# Altium PCB PCB_Arduino_Nano.PcbDoc
Units mil, origin at the board's own origin, x right, y up, seen from the top; angles counter-clockwise.
Board outline 730 x 1700 mil, 2 copper layers (Top Layer, Bottom Layer); 31 components, 43 nets, 156 pads, 52 vias.
Unrouted connection lines stored in the file: 28.
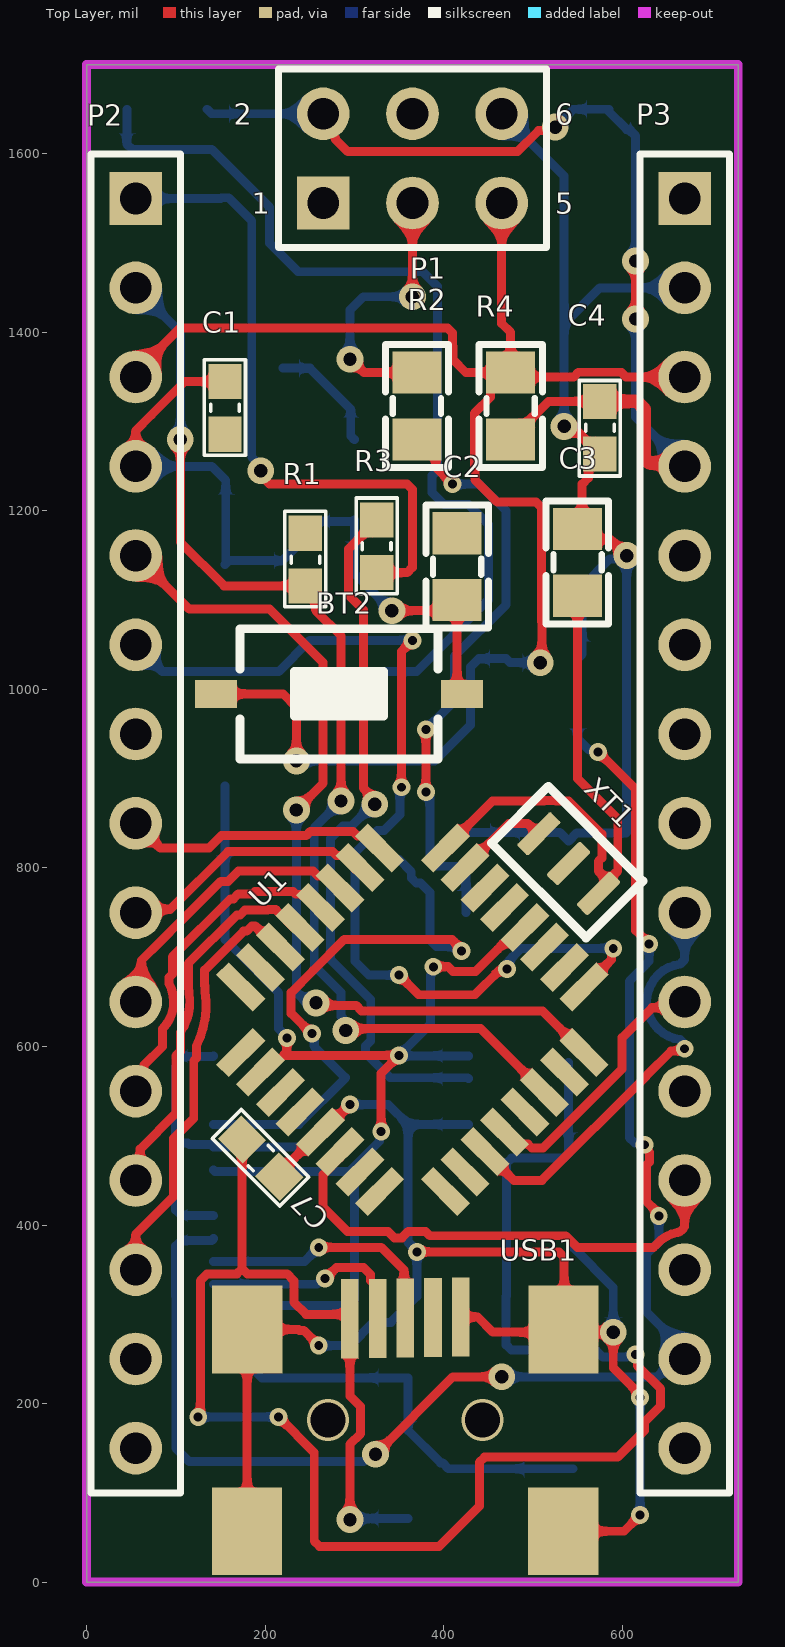
[diagram p0: Top Layer view]
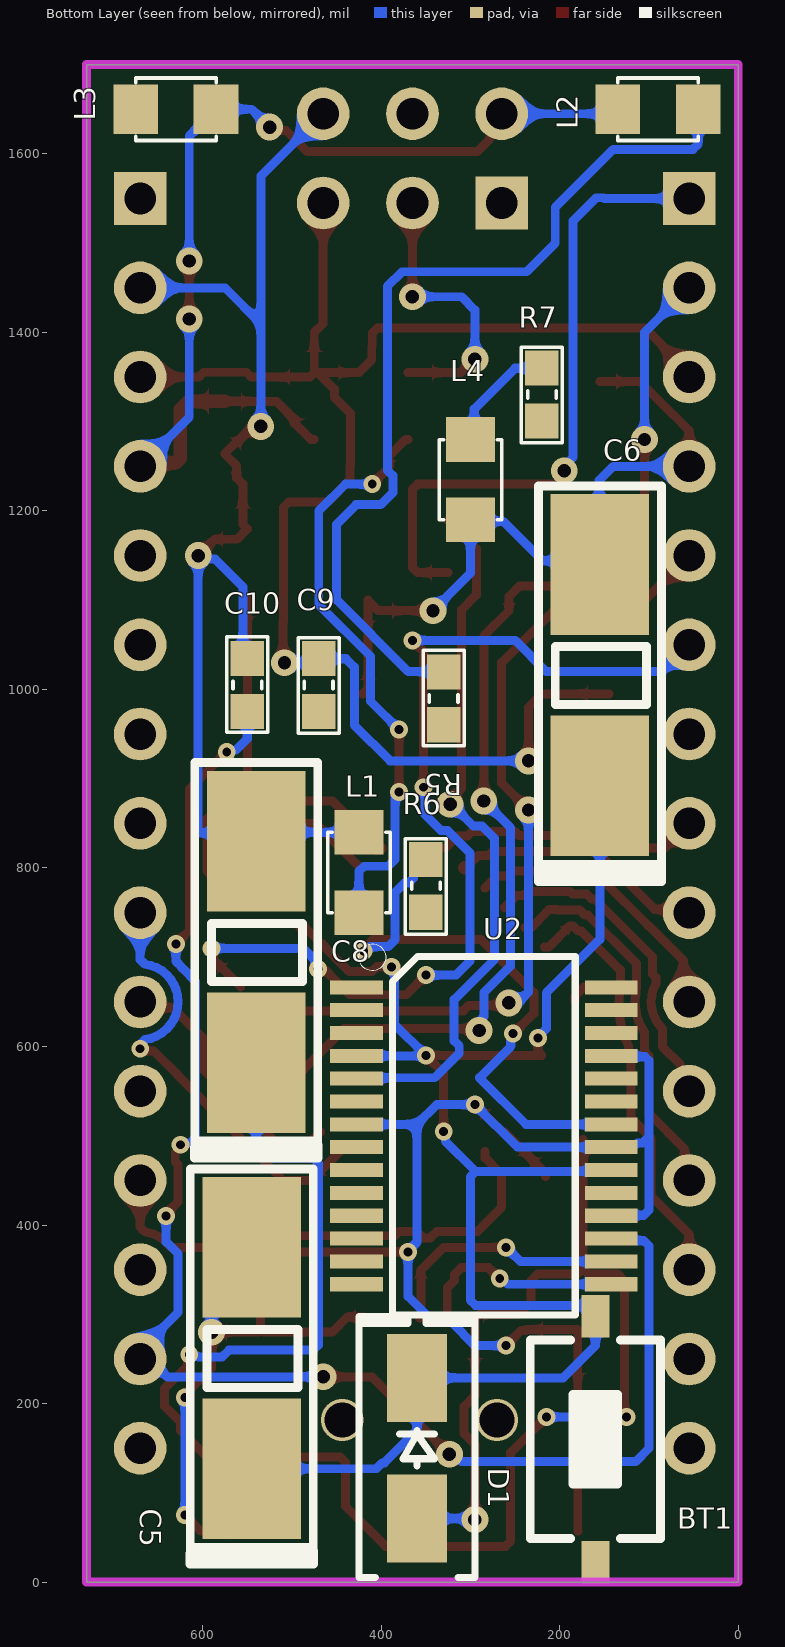
[diagram p1: Bottom Layer view, seen from below]

## Layer stack, top to bottom
Top Solder: solder mask 0.4, Solder Resist, Dk 3.5
Top Layer: signal copper 1.4
Dielectric 1: dielectric 12.6, FR-4, Dk 4.8
Bottom Layer: signal copper 1.4
Bottom Solder: solder mask 0.4, Solder Resist, Dk 3.5

## Board outline
0,0 0,1700 730,1700 730,0

## Design rules (kind name [scope] priority, off if disabled: settings)
Clearance [All] p1: gap=8 ignorepadtopadclearanceinfootprint=FALSE
PolygonConnect [All] p1: connectstyle=Relief reliefconductorwidth=10 reliefentries=4 polygonreliefangle="90 Angle" airgapwidth=10
RoutingVias [All] p1: holewidth=28 width=50 viastyle="Through Hole" minholewidth=10 minwidth=20 maxholewidth=15 maxwidth=30
SolderMaskExpansion [All] p1: expansion=4 istentingtop=FALSE
Width [All] p1: maxlimit=30 minlimit=10 preferedwidth=15
30 further rules are at their usual default settings.

## Components (designator, comment, footprint, x,y, rotation, side; value= is the part's Value field where it differs from the comment)
BT1 "Nut Nhan 2 Chan SMD 3x6x2.5" "Nut Nhan 2 Chan SMD 3x6x2.5" 160,160 r90 bottom
BT2 "Nut Nhan 2 Chan SMD 3x6x2.5" "Nut Nhan 2 Chan SMD 3x6x2.5" 282.8,995 r180 top
C1 "104" "tu 0603" 155,1315.47 r90 top
C2 "15pF" "tu 0805" 415.13,1137.77 r270 top
C3 "15pF" "tu 0805" 549.87,1142.23 r90 top
C4 "104" "tu 0603" 575,1293.17 r270 top
C5 "4.7uF" "tu tantalum smd6032" 545,250.98 r90 bottom
C6 "4.7uF" "tu tantalum smd6032" 155,1015.98 r90 bottom
C7 "104" "tu 0603" 195,475 r135 top
C8 "4.7uF" "tu tantalum smd6032" 540,705.98 r90 bottom
C9 "104" "tu 0603" 470,1005 r270 bottom
C10 "104" "tu 0603" 550,1005 r90 bottom
D1 "SS34" "DIODE SMA" 360,150 r90 bottom
L1 "LED 0805" LED-0805-Red 425,750 r90 bottom
L2 "LED 0805" LED-0805-Red 135,1650 r180 bottom
L3 "LED 0805" LED-0805-Green 585,1650 r0 bottom
L4 "LED 0805" LED-0805-Blue 300,1280 r270 bottom
P1 "Header 3X2" HDR2X3 265,1545 r0 top
P2 "Header 15" HDR1X15 55,1550 r270 top
P3 "Header 15" HDR1X15 670,1550 r270 top
R1 "1k" "tro smd 0603" 245,1145.47 r90 top
R2 "680R" "Tro SMD 0805" 367.61,1317.43 r90 top
R3 "1k" "tro smd 0603" 325,1160.47 r90 top
R4 "1k" "tro smd 0805" 472.61,1317.43 r90 top
R5 "680R" "tro smd 0603" 330,990 r90 bottom
R6 "680R" "tro smd 0603" 350,780 r270 bottom
R7 "680R" "tro smd 0603" 220,1330.42 r270 bottom
U1 "ATMEGA168-20AU" QFP80P900X900X120-32N 365,630 r225 top
U2 "INTERFACE-FT232RL(SSOP28)" SSOP28-0.65-10.2X5.2MM 285,500 r270 bottom
USB1 "USB Mini 5p SMD" "USB Mini 5p SMD" 360,160 r180 top
XT1 "20Mhz" "Thach Anh 3 Chan SMD" 506.59,838.41 r315 top value=4Mhz

## Footprints (in the part's own frame and the unit in brackets; to place one, negate y for a bottom-side part, rotate by r counter-clockwise, add the part's x,y. Pads: shape width x height; smd on the part's side, far side on the other; paste and mask are expansions set on the pad)
"DIODE SMA" [mm] "SMA"
  rect 2.5x1.7 smd: 1(-2,0) 2(2,0)
  silkscreen extent -3.68,-1.65 3.75,1.65, body extent -2.6,-1.37 2.6,1.37, height 2.4
HDR1X15 [mm] "Connector; Header; 15 Position"
  rect 1.5x1.5 hole 0.9: 1(0,0)
  round 1.5 hole 0.9: 2(2.54,0) 3(5.08,0) 4(7.62,0) 5(10.16,0) 6(12.7,0) 7(15.24,0) 8(17.78,0) 9(20.32,0) 10(22.86,0) 11(25.4,0) 12(27.94,0) 13(30.48,0) 14(33.02,0) 15(35.56,0)
  silkscreen extent -1.27,-1.27 36.83,1.27
HDR2X3 [mm] "Connector; Header; 3x2 Position"
  rect 1.5x1.5 hole 0.9: 1(0,0)
  round 1.5 hole 0.9: 2(0,2.54) 3(2.54,0) 4(2.54,2.54) 5(5.08,0) 6(5.08,2.54)
  silkscreen extent -1.27,-1.27 6.35,3.81
LED-0805-Blue [mil]
  rect 50x55 smd: 1(0,0) 2(90,0)
  silkscreen extent 0,-35 90,35, body extent 5,-25 85,25, height 43
LED-0805-Green [mil]
  rect 50x55 smd: 1(0,0) 2(90,0)
  silkscreen extent 0,-35 90,35, body extent 5,-25 85,25, height 43
LED-0805-Red [mil]
  rect 50x55 smd: 1(0,0) 2(90,0)
  silkscreen extent 0,-35 90,35, body extent 5,-25 85,25, height 43
"Nut Nhan 2 Chan SMD 3x6x2.5" [mm] "Switch SMD type"
  rect 1.2x0.8 smd: 1(-3.5,0) 2(3.5,0)
  silkscreen extent -2.82,-1.85 2.82,1.85, body extent -3.05,-1.85 3.05,1.85, height 2.5
QFP80P900X900X120-32N [mil]
  rect 58x20 smd: 1(-162,110) 2(-162,79) 3(-162,47) 4(-162,16) 5(-162,-16) 6(-162,-47) 7(-162,-79) 8(-162,-110) 17(162,-110) 18(162,-79) 19(162,-47) 20(162,-16) 21(162,16) 22(162,47) 23(162,79) 24(162,110)
  rect 20x58 smd: 9(-110,-162) 10(-79,-162) 11(-47,-162) 12(-16,-162) 13(16,-162) 14(47,-162) 15(79,-162) 16(110,-162) 25(110,162) 26(79,162) 27(47,162) 28(16,162) 29(-16,162) 30(-47,162) 31(-79,162) 32(-110,162)
SSOP28-0.65-10.2X5.2MM [mm]
  rect 0.4x1.5 smd: 1(-4.225,-3.625) 2(-3.575,-3.625) 3(-2.925,-3.625) 4(-2.275,-3.625) 5(-1.625,-3.625) 6(-0.975,-3.625) 7(-0.325,-3.625) 8(0.325,-3.625) 9(0.975,-3.625) 10(1.625,-3.625) 11(2.275,-3.625) 12(2.925,-3.625) 13(3.575,-3.625) 14(4.225,-3.625) 15(4.225,3.625) 16(3.575,3.625) 17(2.925,3.625) 18(2.275,3.625) 19(1.625,3.625) 20(0.975,3.625) 21(0.325,3.625) 22(-0.325,3.625) 23(-0.975,3.625) 24(-1.625,3.625) 25(-2.275,3.625) 26(-2.925,3.625) 27(-3.575,3.625) 28(-4.225,3.625)
  silkscreen extent -5.46,-3.56 5.1,2.6
"Thach Anh 3 Chan SMD" [mm] "SMD Crystal CMR309T package"
  rrect25% 0.45x1.35 smd: 1(0,0) 2(1.2,0) 3(2.4,0)
  silkscreen extent -0.76,-1.14 3.05,1.14, body extent -0.41,-0.63 2.79,0.67, height 1.02
"tro smd 0603" [mm] "Chip Capacitor, 2-Leads, Body 1,60x0,80mm, IPC Medium Density"
  rect 1x0.95 smd mask+0.076: 1(-0.75,0) 2(0.75,0)
  silkscreen extent -1.35,-0.58 1.37,0.58, body extent -0.82,-0.42 0.82,0.43, height 0.44
"Tro SMD 0805" [mm]
  rect 1.2x1.4 smd: 1(-0.946,-0.061) 2(0.954,-0.061)
  silkscreen extent -1.75,-0.97 1.75,0.84, body extent -1.56,-0.76 1.44,0.64, height 0.53
"tro smd 0805" [mm]
  rect 1.2x1.4 smd: 1(-0.946,-0.061) 2(0.954,-0.061)
  silkscreen extent -1.75,-0.97 1.75,0.84, body extent -1.56,-0.76 1.44,0.64, height 0.53
"tu 0603" [mm] "Chip Capacitor, 2-Leads, Body 1,60x0,80mm, IPC Medium Density"
  rect 1x0.95 smd mask+0.076: 1(-0.75,0) 2(0.75,0)
  silkscreen extent -1.35,-0.58 1.37,0.58, body extent -0.8,-0.4 0.8,0.4, height 0.9
"tu 0805" [mm] "Compoment SMD 80x50mil"
  rect 1.2x1.4 smd: 1(-0.946,-0.003) 2(0.954,-0.003)
  silkscreen extent -1.75,-0.89 1.75,0.89, body extent -1.01,-0.64 1.01,0.63, height 0.61
"tu tantalum smd6032" [mm]
  rect 4x2.8 smd: 1(-3.15,0) 2(3.15,0)
  silkscreen extent -5.87,-1.75 5.38,1.75, body extent -3.15,-1.75 3.15,1.75, height 2.79
"USB Mini 5p SMD" [mm]
  rect 0.5x2.25 smd: 1(1.651,-3.429) 2(0.864,-3.442) 3(0.076,-3.454) 4(-0.711,-3.467) 5(-1.499,-3.48)
  rect 2x2.5 smd: 5(-4.424,-3.124) 5(-4.42,2.616) 5(4.576,-3.124) 5(4.58,2.616)
  body extent -5.27,-3.8 5.43,5.4, height 3.95

## Part data
C1 C4 C7 C9 C10: library part "Tu 0603 104 50V 10%", "Dán", Chung_Loai=Dán, Don_Vi=Con, Ma_Hang=MH004568, So_Chan=2, Ten_Linh_Kien="Tụ 0603 104-100nF 10% 50V"
C2 C3: library part "Tu 0805 15pF 50V 10%", "Dán", Chung_Loai=Dán, Don_Vi=Con, Ma_Hang=MH004556, So_Chan=2, Ten_Linh_Kien="Tụ 0805 15P 10% 50V"
C5 C6 C8: library part "Tu tantalum 4.7uF 35V SMD6032", "Dán", Chung_Loai=Dán, Don_Vi=Con, Ma_Hang=MH008687, So_Chan=2, Ten_Linh_Kien="Tụ tantalum 475V-4.7uF 35V SMD6032"
D1: library part "Diode SS34 ( 1N5822 )", "Dán", Chung_Loai=Dán, Don_Vi=Con, Ma_Hang=MH002104, Ten_Linh_Kien="Diode SS34 3A 40V SMA ( 1N5822 SS34A)"
L1 L2: library part "LED 0805 Do", "Dán", Chung_Loai=Dán, Don_Vi=Con, Ma_Hang=MH000897, Ten_Linh_Kien="LED 0805 Màu Đỏ (Red)"
L3: library part "LED 0805 Xanh La", "Dán", Chung_Loai=Dán, Don_Vi=Con, Ma_Hang=MH002326, Ten_Linh_Kien="LED 0805 Màu Xanh Lá (Green)"
L4: library part "LED 0805 Xanh Duong", "Dán", Chung_Loai=Dán, Don_Vi=Con, Ma_Hang=MH002327, Ten_Linh_Kien="LED 0805 Màu Xanh Dương (Blue)"
P1: "Header, 3-Pin, Dual row", LatestRevisionDate=17-Jul-2002, LatestRevisionNote="Re-released for DXP Platform.", Publisher="Altium Limited"
P2 P3: "Header, 15-Pin", LatestRevisionDate=17-Jul-2002, LatestRevisionNote="Re-released for DXP Platform.", Publisher="Altium Limited"
R1 R3: library part "Tro 0603 5% 1k", "Dán", Chung_Loai=Dán, Don_Vi=Con, Ma_Hang=MH006319, So_Chan=2, Ten_Linh_Kien="Trở 0603 5% 1k"
R2: library part "Tro 0805 5% 680R", "Dán", Chung_Loai=Dán, Don_Vi=Con, Ma_Hang=MH005344, So_Chan=2, Ten_Linh_Kien="Trở 0805 5% 680R"
R4: library part "Tro 0805 5% 1k", "Dán", Chung_Loai=Dán, Don_Vi=Con, Ma_Hang=MH005234, So_Chan=2, Ten_Linh_Kien="Trở 0805 5% 1k"
R5 R6 R7: library part "Tro 0603 1% 680R", "Dán", Chung_Loai=Dán, Don_Vi=Con, Ma_Hang=MH006336, So_Chan=2, Ten_Linh_Kien="Trở 0603 1% 680R"
U1: "AVR AVRÂ® ATmega Microcontroller IC 8-Bit 20MHz 16KB _8K x 16_ FLASH 32-TQFP _7x7_", Package="TQFP-32 Microchip", Availability=Unavailable, MF=Microchip, MP=ATMEGA168-20AU, Price=None, SnapEDA_Link=https://www.snapeda.com/parts/ATMEGA168-20AU/Microchip/view-part/776709/?ref=snap
U2: "USB Bridge, USB to UART USB 2.0 UART Interface 28-SSOP", Package="SSOP-28 FTDI, Future", Availability=Unavailable, MF="FTDI, Future", MP=FT232RL, Price=None, SnapEDA_Link=https://www.snapeda.com/parts/FT232RL/FTDI%2C%20Future%20Technology%20Devices%20International%20Ltd/view-part/1077088/?ref=snap
USB1: "USB Type B", Ma_Hang=MH001022, Ten="MiniUSB 5P SMD"
XT1: library part "Thach anh 3 Chan SMD", "Crystal For all Crystal 2pin."
BT1 BT2: Ma_Hang=MH001036, Ten="Nút Nhấn 2 Chân 3x6x2.5MM SMD"

## Via types
v1: diameter 20, hole 10, Top Layer to Bottom Layer, 29 vias
v2: diameter 30, hole 15, Top Layer to Bottom Layer, 21 vias
v3: diameter 47.24, hole 39.37, Top Layer to Bottom Layer, 2 vias

## Nets (pads, with @x,y where several pads share a name; then routed paths per layer and width w, separated by ;. In a path a pad name is that pad's centre, name@x,y a point inside that pad or via, vN(x,y) a via of type N, cw(c..) or ccw(c..) an arc to the next point about the centre after c; other vN are vias at no path point)
3V3: C10.1 P3.14 U2.17 | length 1715.5
  Top Layer w10: v2(323.64,143.29) 410.35,230 v2(465,230) ; v1(573,930) 615,888 615,730 v1(630,715) ; v1(625,490) 625,487.29 630.71,481.58 630.71,470.86 627.47,467.62 627.47,426.23 641,412.71 v1(641,410)
  Bottom Layer w10: U2.17 140.09,382.65 105.86,382.65 99.76,376.55 99.76,320.4 100,320.16 100,150 115,135 309.94,135 318.23,143.29 v2(323.64,143.29) ; v2(465,230) 639.61,230 659.61,250 P3.14 670,260 627.47,302.53 627.47,367.62 641,381.14 v1(641,410) ; C10.1 550,945 563.09,931.91 571.09,931.91 v1(573,930) v1@575,930 ; v1(625,490) 623.09,491.91 614.05,491.91 608.12,497.84 608.12,673.12 622.45,687.45 cw(c670,650) 627.2,692.8 630,695.6 v1(630,715)
A0: P3.5 U1.23
A1: P3.6 U1.24
A2: P3.7 U1.25
A3: P3.8 U1.26
A4: P3.9 U1.27 | length 498.9
  Top Layer w10: U1.27 478.53,450 510,450 627.47,567.47 627.47,567.62 654.86,595 660.4,595 661.02,595.61 668.09,595.61 v1(670,597.53) ; P3.9@666.33,746.33 P3.9
  Bottom Layer w10: v1(670,597.53) 670,602.58 667.07,605.5 664.78,607.79 cw(c670,650) 664.78,692.21 667.07,694.5 670,697.42 P3.9
A5: P3.10 U1.28 | length 297.6
  Top Layer w10: U1.28 481.67,490.7 494.4,490.7 498.92,486.19 511.19,486.19 600,575 600,610 633.51,643.51 663.51,643.51 P3.10
A6: P3.11 U1.19
A7: P3.12 U1.22 | length 559.4
  Top Layer w10: U1.22 283.68,475.14 265,456.46 265,420 289.07,395.93 292,393 337.46,393 344.82,385.63 353.11,385.63 360.47,393 379.53,393 384.53,388 536.6,388 549.6,375 634.97,375 637.9,377.93 638.11,378.14 cw(c670,350) 661.95,391.76 ccw(c660,401.57) 668.16,395.79 670,398.39 P3.12
AREF: BT1.1 C1.1 P3.13 U1.20
D0/RX: P2.2 R1.1 U1.30 | length 1260.4
  Top Layer w10: v2(105,1280) 105,1165 154.06,1115.94 R1.1 256.83,1104.12 256.83,1088.17 285,1060 v2(285,875) ; v2(290.3,618) 292.3,620 441.47,620 U1.30
  Bottom Layer w10: P2.2 105,1400 v2(105,1280) ; v2(285,875) 255,845 255,690.42 285,660.42 285,633.86 286.47,632.39 286.47,621.83 v2(290.3,618)
D1/TX: P2.1 R3.1 U1.31 | length 736.5
  Top Layer w10: v2(195,1245) 195,1240 205,1230 359.14,1230 365,1224.14 365,1136.8 359.14,1130.94 R3.1
  Bottom Layer w10: P2.1 150,1550 150.86,1550.86 159.14,1550.86 185,1525 185,1260.41 195,1250.41 v2(195,1245)
D2: P2.5 U1.32 | length 991.6
  Top Layer w10: P2.5 115,1090 205,1090 265,1030 265,895 v2(235,865) ; v2(257,648.83) 259.83,646 301.9,646 307.9,640 510.56,640 U1.32
  Bottom Layer w10: v2(235,865) 235,660.97 243.32,652.65 253.17,652.65 v2(257,648.83)
D3: P2.6 U1.1 | length 1117.2
  Top Layer w10: v1(350,680) 372,658 435.04,658 461.99,684.95 469.06,684.95 v1(470.97,686.87) ; v1(352.54,890.49) 352.54,1042.54 v1(365,1055) ; U1.1 588.09,697.52 588.09,708.09 v1(590,710)
  Bottom Layer w10: P2.6 85,1020 215,1020 250,1055 v1(365,1055) ; v1(350,680) 316.34,680 300.67,695.67 300.67,816.97 325.91,842.21 333.19,842.21 350.83,859.86 350.83,888.78 v1(352.54,890.49) 353.03,890 v1@355,890 ; v1(470.97,686.87) 472.89,688.78 472.89,695.85 487.04,710 v1(590,710)
D4: P2.7 U1.2
D5: P2.8 U1.9 | length 300.1
  Top Layer w10: P2.8 82.67,822.33 136.88,822.33 150.91,836.36 245.96,836.36 250.59,840.99 298.26,840.99 303.48,835.77 314.8,835.77 U1.9
D6: P2.9 U1.10 | length 288.1
  Top Layer w10: P2.9 58.67,753.67 93.67,753.67 158.36,818.36 275.63,818.36 280.15,813.85 291.15,813.85 302.77,802.23 U1.10@302.77,800.41
  Top Layer w15: U1.10@302.77,800.41 U1.10
D7: P2.10 U1.11 | length 320.5
  Top Layer w10: P2.10 61.49,656.49 61.49,696.49 82.93,717.93 ccw(c55,750) 87.07,722.07 100.67,735.67 101.13,735.67 150.46,785 158.63,785 170.07,796.44 253.71,796.44 258.93,791.22 270.25,791.22 U1.11
D8: P2.11 U1.12 | length 372.3
  Top Layer w10: P2.11 64.39,559.39 64.39,579.39 85,600 85,615.95 85,619.86 ccw(c55,650) 92.2,670.61 92.2,673.05 92.2,677.2 96.09,681.09 96.09,700.5 160.86,765.27 164.36,765.27 170.09,771 186,771 188.81,773.81 231.08,773.81 234.29,770.61 239.94,770.61 241.26,769.3 248.33,769.3 U1.12
D9: P2.12 U1.13 | length 424.7
  Top Layer w10: P2.12 60,455 60,485 100,525 100,589.54 105,594.54 105,615.89 ccw(c55,650) 114.75,659.65 cw(c124.64,661.18) 114.67,660.37 114.13,666.97 ccw(c104.16,666.15) 114.09,667.36 114.09,693.05 168.31,747.27 171.81,747.27 177.54,753 196.24,753 196.78,752.72 198.58,752.72 202.72,752.72 203.63,753.63 207.53,753.63 211.67,753.63 214.6,750.7 232.06,733.24 U1.13
D10: P2.13 U1.14 | length 481.1
  Top Layer w10: P2.13 55,389.86 97.53,432.38 97.53,497.07 120,519.54 120,584.09 123,587.09 123,600.84 ccw(c31.08,646.61) 132.75,661 132.75,667.74 132.13,668.36 132.13,674.78 132.09,674.82 132.09,685.59 175.77,729.27 179.27,729.27 185,735 188.78,735 212.46,711.32 U1.14
D11/MOSI: P1.4 P2.14 U1.15
D12/MISO: P1.1 P2.15 U1.16 | length 41.6
  Top Layer w10: P2.15 P2.15@68.27,150 ; U1.16 182.67,656.77 U1.16@182.67,649.7
  Bottom Layer w10: P1.1 P1.1@270,1540
D13/SCK: P1.3 P3.15 R2.2 U1.17 | length 326.6
  Top Layer w10: v2(295,1370) 295.86,1370 310.86,1355 R2.2 ; v2(365,1440) P1.3 P1.3@371.49,1538.51
  Bottom Layer w10: v2(295,1370) 295,1425 310,1440 v2(365,1440)
GND: BT2.1 C1.2 C2.2 C3.2 C4.2 C5.2 C6.2 C7.1 C8.2 C10.2 L1.2 L4.2 P1.6 P2.4 P3.2 U1.3 U1.5 U1.21 U2.7 U2.18 U2.21 U2.25 USB1.5 | length 4455.3
  Top Layer w10: P2.4 55,1290 72.47,1307.47 72.62,1307.47 110.14,1345 C1.2 ; USB1.5@179.67,57 179.83,57.17 179.83,283 237.4,283 238.4,282 243,282 v1(260,265) ; C7.1 215.88,458.25 U1.21 ; U1.21@263.83,503.83 v1(295,535) ; v2(342,1088.26) 403.06,1088.26 C2.2 415,1000.59 BT2.1 ; v1(370,370) 529.14,370 535,364.14 535,283.83 USB1.5@534.17,283 ; USB1.5@419,297 438,297 455,280 531.17,280 USB1.5@534.17,283 ; USB1.5@534.17,57.17 534,57 602,57 v1(620,75) ; v2@535,1295 534.85,1294.85 v2(534.85,1294.69) 538.68,1290.87 547.77,1290.87 560.31,1278.32 561.3,1278.32 575,1264.62 C4.2 562.02,1250.66 562.02,1237.02 555,1230 555,1184.8 C3.2 561.5,1168.3 586.7,1168.3 v2(605,1150) ; v1(620,207) 618.09,208.91 618.09,211.91 590,240 v2(590,280) 537.17,280 USB1.5@534.17,283
  Bottom Layer w10: P2.4 140,1250 155.86,1234.14 C6.2@155.86,1140.86 ; U2.18 141.83,410.88 105.86,410.88 99.76,416.98 99.76,474.87 100,475.12 100,499.29 ; U2.25 141.41,588.69 104.55,588.69 100,584.14 100,577.48 99.76,577.24 99.76,550.72 99.76,499.54 100,499.29 ; C6.2 C6.2@155.86,1140.86 ; v1(260,265) 295.2,265 321.15,290.95 340.95,290.95 370,320 v1(370,370) 370,370.86 360,380.86 360,512.8 ; v2(342,1088.26) 300,1130.26 L4.2 298.36,1188.36 263.36,1188.36 219.26,1144.26 159.26,1144.26 C6.2@155.86,1140.86 ; L1.2 530,840 C8.2 549.26,839.26 604.26,839.26 605,840 v2(605,1150) 601.29,1146.29 586.29,1146.29 555,1115 555,1039.53 C10.2 ; U2.7 360,512.8 ; P1.6 534.85,1575.15 534.85,1409.85 ; v2(534.85,1294.69) 534.85,1409.85 ; C5.2 590,330 v2(590,280) ; v1(620,75) v1(620,207) ; P3.2 575,1450 534.85,1409.85 ; 100,499.29 107.37,491.92 113.08,491.92 114.92,490.08 139.41,490.08 U2.21 247.2,487.2 v1(295,535) 337.8,535 360,512.8
NetAMS1_2: R7.2
NetC9_2: C9.2 U2.2
NetL1_1: L1.1 R2.1 | length 653.3
  Top Layer w10: R2.1 372.48,1280.2 391.1,1261.57 391.1,1248.9 v1(410,1230) ; v1(380,885) v1(380,955)
  Bottom Layer w10: v1(380,955) 412,987 412,1037 470,1095 470,1200 440,1230 v1(410,1230) ; v1@384.5,877.79 384.5,809.62 392.12,802 419.14,802 425,796.14 L1.1
NetL2_2: L2.2 R5.2 | length 1025.9
  Bottom Layer w10: L2.2 45,1610.86 50.86,1605 140,1605 205,1540 205,1500 237,1468 376.6,1468 393,1451.6 393,1245.53 387,1239.53 387,1220.47 400.47,1207 428,1207 450,1185 450,1100.46 369.54,1020 330.47,1020 R5.2
NetL3_2: L3.2 R6.2
NetL4_1: L4.1 R7.1 | length 130.7
  Bottom Layer w10: R7.1 250.06,1359.94 295.86,1314.14 295.86,1284.14 L4.1
NetR5_1: R5.1 U2.23
NetR6_1: R6.1 U2.22 | length 650.1
  Top Layer w10: v1(252.45,614.57) 251.65,614.57 229,637.23 229,660.42 253.58,685 288.58,720 409.14,720 420,709.14 v1(420,707)
  Bottom Layer w10: U2.22 237.8,512.8 290.18,565.18 289.82,565.18 255,600 v1@255,604.95 ; R6.1 363.7,795.83 363.7,789.02 369.56,783.16 374.09,783.16 384.5,772.74 384.5,719.62 392.12,712 412.29,712 417.29,707 v1(420,707)
RESET: BT2.2 C9.1 P1.5 P2.3 P3.3 R4.2 U1.29 | length 1793.8
  Top Layer w10: P2.3 55,1355 105,1405 404.14,1405 410,1399.14 410,1384.57 410.56,1384.01 410.56,1369.44 425,1355 R4.2@471.06,1355 ; BT2.2 220,995 235,980 v2(235,920) ; P1.5 465,1410 475,1400 R4.2 ; v2(508.3,1030) 510,1031.7 510,1075.43 509.44,1075.99 509.44,1204.14 503.58,1210 460,1210 435,1235 435,1250.63 434.44,1251.19 434.44,1309.2 435,1309.76 435,1310 452.44,1327.44 452.44,1336.38 R4.2@471.06,1355 ; P3.3 604.46,1350 599.09,1355.38 550.91,1355.38 545.54,1350 480,1350 R4.2 ; R4.2@471.06,1355 R4.2
  Bottom Layer w10: v2(235,920) 390,920 430,960 430,1025 439.53,1034.53 C9.1 474.53,1030 v2(508.3,1030)
RX: R1.2 U2.1
TX: R3.2 U2.5 | length 798.3
  Top Layer w10: v2(322.83,871.46) 322.83,876.76 310,889.6 310,1089.17 293.3,1105.88 293.3,1157.31 325,1189.02 R3.2
  Bottom Layer w10: v2(322.83,871.46) 321.06,871.46 296.6,847 287,847 273,833 273,697.88 318.3,652.58 318.3,606.4 312.59,600.69 312.59,592.41 340,565 426.69,565 U2.5
USBDM: U2.15 USB1.2 | length 239
  Top Layer w10: v1(267.18,340.13) 267.61,340.13 279.77,352.29 310.23,352.29 317.84,344.68 317.84,338.11 326,329.95 USB1.2
  Bottom Layer w10: U2.15 258,333.66 264.47,340.13 v1(267.18,340.13)
USBDP: U2.16 USB1.3 | length 284.4
  Top Layer w10: v1(260,375) 330,375 355.57,349.43 355.57,297.43 USB1.3
  Bottom Layer w10: U2.16 244.25,359.25 v1(260,375)
VCC2: BT1.2 C4.1 C5.1 C6.1 D1.2 L2.1 L3.1 P1.2 P3.4 R4.1 U1.4 U1.6 U1.18 U2.4 U2.20 | length 3114.7
  Top Layer w10: v1(224.28,609.42) 224.28,593.93 220.35,590 v1(350,590) 330,570 v1(330,505) ; P1.2 265,1631.73 278.99,1617.74 278.99,1616.01 292.53,1602.47 482.62,1602.47 506.36,1626.22 521.22,1626.22 v2(525,1630) ; v1(388.38,689.31) 388.69,689.61 404.86,689.61 410.47,684 435.58,684 484.82,733.24 U1.4 ; R4.1 478.94,1280.2 497.56,1298.82 497.56,1302.76 517.5,1322.69 C4.1 ; v2@615,1410 v2(615,1415) v2(615,1480)
  Top Layer w15: C4.1 616.21,1322.69 625,1313.91 625,1258.79 630.1,1253.68 666.32,1253.68 P3.4
  Bottom Layer w10: L2.1 140,1645 P1.2 ; U2.20 143.9,460 294.14,460 ; C6.1 155,720 215,660 215,620 224.28,610.72 v1(224.28,609.42) ; v1(330,505) 328.09,503.09 328.09,493.94 294.14,460 ; v1(388.38,689.31) 390.71,689.31 392.8,687.21 388.99,687.21 386.47,684.69 386.47,680.88 385.19,679.6 385.19,654.01 385.19,625.19 v1(350,590) 350.43,589.57 U2.4 ; v2(525,1630) 545,1650 L3.1 585,1647.5 605,1627.5 607.5,1627.5 615,1620 v2(615,1480) ; C5.1 405.35,126.97 398.85,133.47 396.53,133.47 360,170 D1.2 196.26,228.74 160,265 BT1.2 160,299.14 170.75,309.89 294.14,309.89 300,315.75 300,454.14 294.14,460 ; v2(615,1415) 615,1305 P3.4
VIN: P3.1 | length 23.3
  Bottom Layer w10: P3.1@653.54,1533.54 P3.1
VUSB: C7.2 C8.1 D1.1 USB1.1 | length 2145.7
  Top Layer w10: v1(125,185) 127.46,187.46 127.46,337.6 135.08,345.21 168.26,345.21 174.12,351.07 ; C7.2 174.12,476.5 174.82,475.81 174.12,475.11 174.12,351.07 ; v1(215,185) 255,145 255,45.86 260.86,40 395,40 440,85 440,134.14 445.86,140 595,140 625,170 625,179.47 643,197.47 643,216.53 616.91,242.61 616.91,253.09 v1(615,255) ; v2(295,70) 295,154.25 307.01,166.26 307.01,196.59 295,208.6 USB1.1 ; USB1.1@295,295.16 290.16,300 245.86,300 232.2,313.65 232.2,337.6 224.59,345.21 179.98,345.21 174.12,351.07
  Bottom Layer w10: v1(125,185) v1(215,185) ; v2(295,70) 296.26,71.26 D1.1 ; C8.1 540,480.86 534.14,475 476.1,475 470.24,469.14 470.24,449.28 470.24,320.4 470,320.16 470,265.86 475.86,260 570.4,260 578.4,252 604.93,252 606.02,253.09 613.09,253.09 v1(615,255)
XTAL1: C2.1 U1.7 XT1.1 | length 108.9
  Top Layer w10: U1.7 473.28,850 494.14,850 504.67,839.47 XT1.1@504.67,838.41
  Top Layer w15: XT1.1@504.67,838.41 XT1.1
XTAL2: C3.1 U1.8 XT1.3 | length 634.7
  Top Layer w10: U1.8 454.44,875 512.27,875 512.82,875.54 525.42,875.54 525.97,875 540,875 577.14,837.86 577.14,811.23 573.41,807.49 573.41,796.59 583.18,786.82 583.18,781.36 XT1.3 ; C3.1 550,900 595,855 595,796.59 XT1.3@584.23,785.82
  Top Layer w15: U1.8 U1.8@405.31,822.33
pads on no net: U2.3 U2.6 U2.8 U2.9 U2.10 U2.11 U2.12 U2.13 U2.14 U2.19 U2.24 U2.26 U2.27 U2.28 USB1.4 XT1.2
copper on no net:
  other v3: 270.39,181.43 443.61,181.43

## Keep-outs
Keep-Out Layer:
  the board outline again, w10

## Text inside footprints (layer, text, board x,y; h text height)
P1: Top Overlay "6" at 525,1625 h40; Top Overlay "5" at 525,1525 h40; Top Overlay "2" at 165,1625 h40; Top Overlay "1" at 185,1525 h40